# EAGLE board board_power (EAGLE 7.5.0)
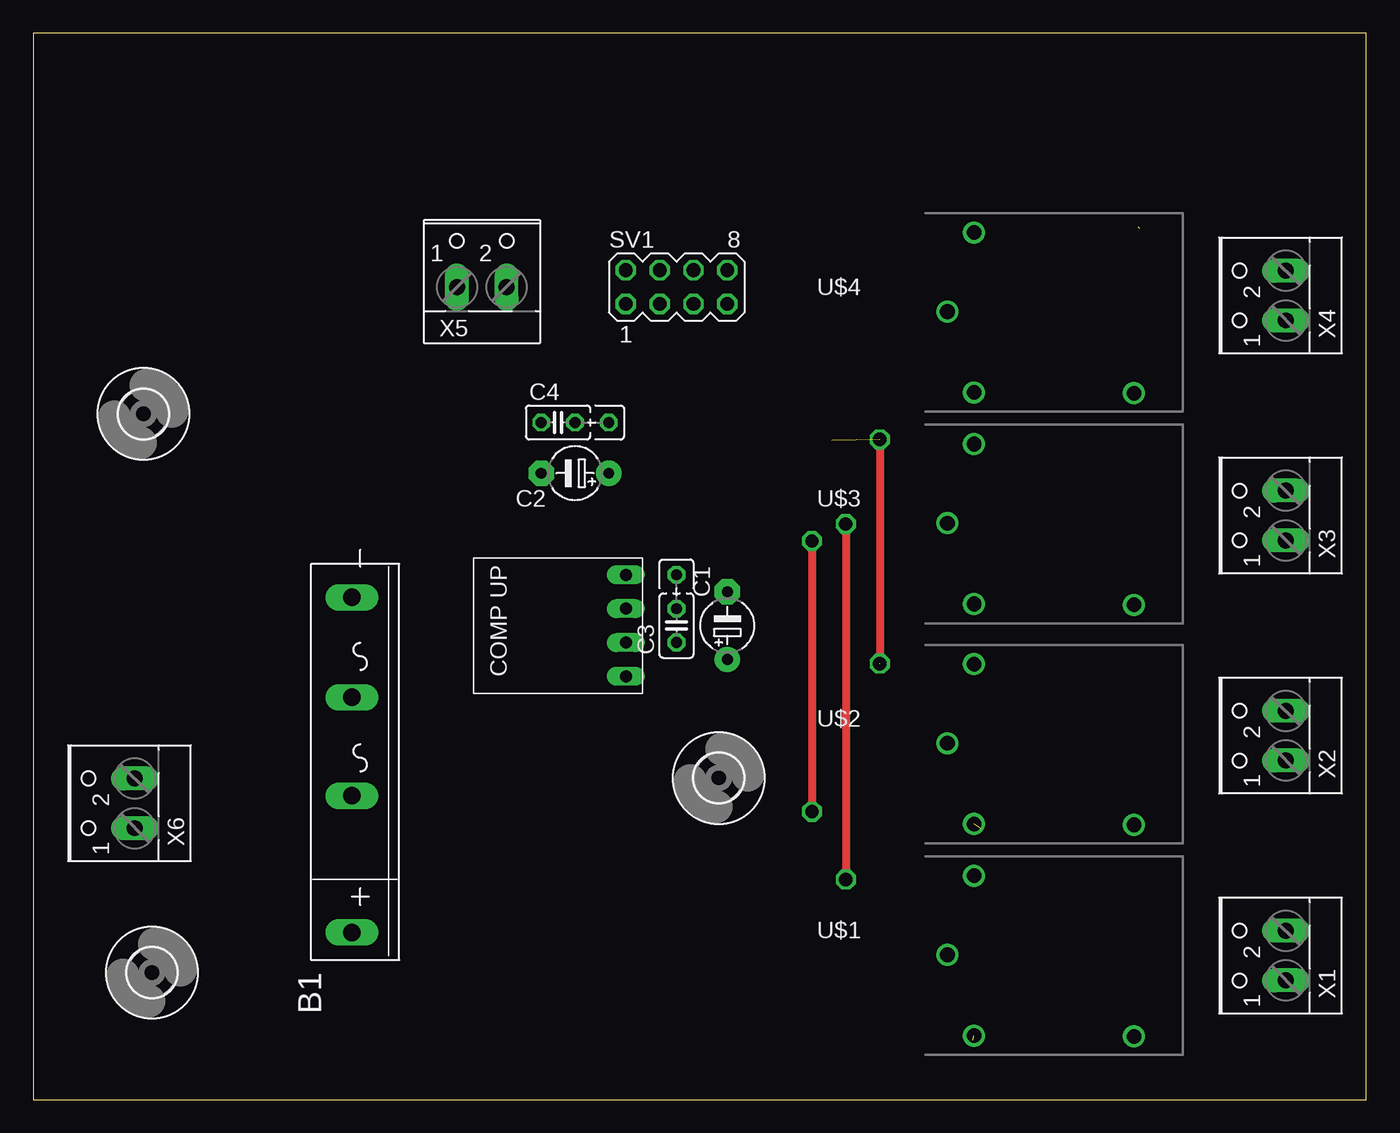
[diagram p0: board, top side]
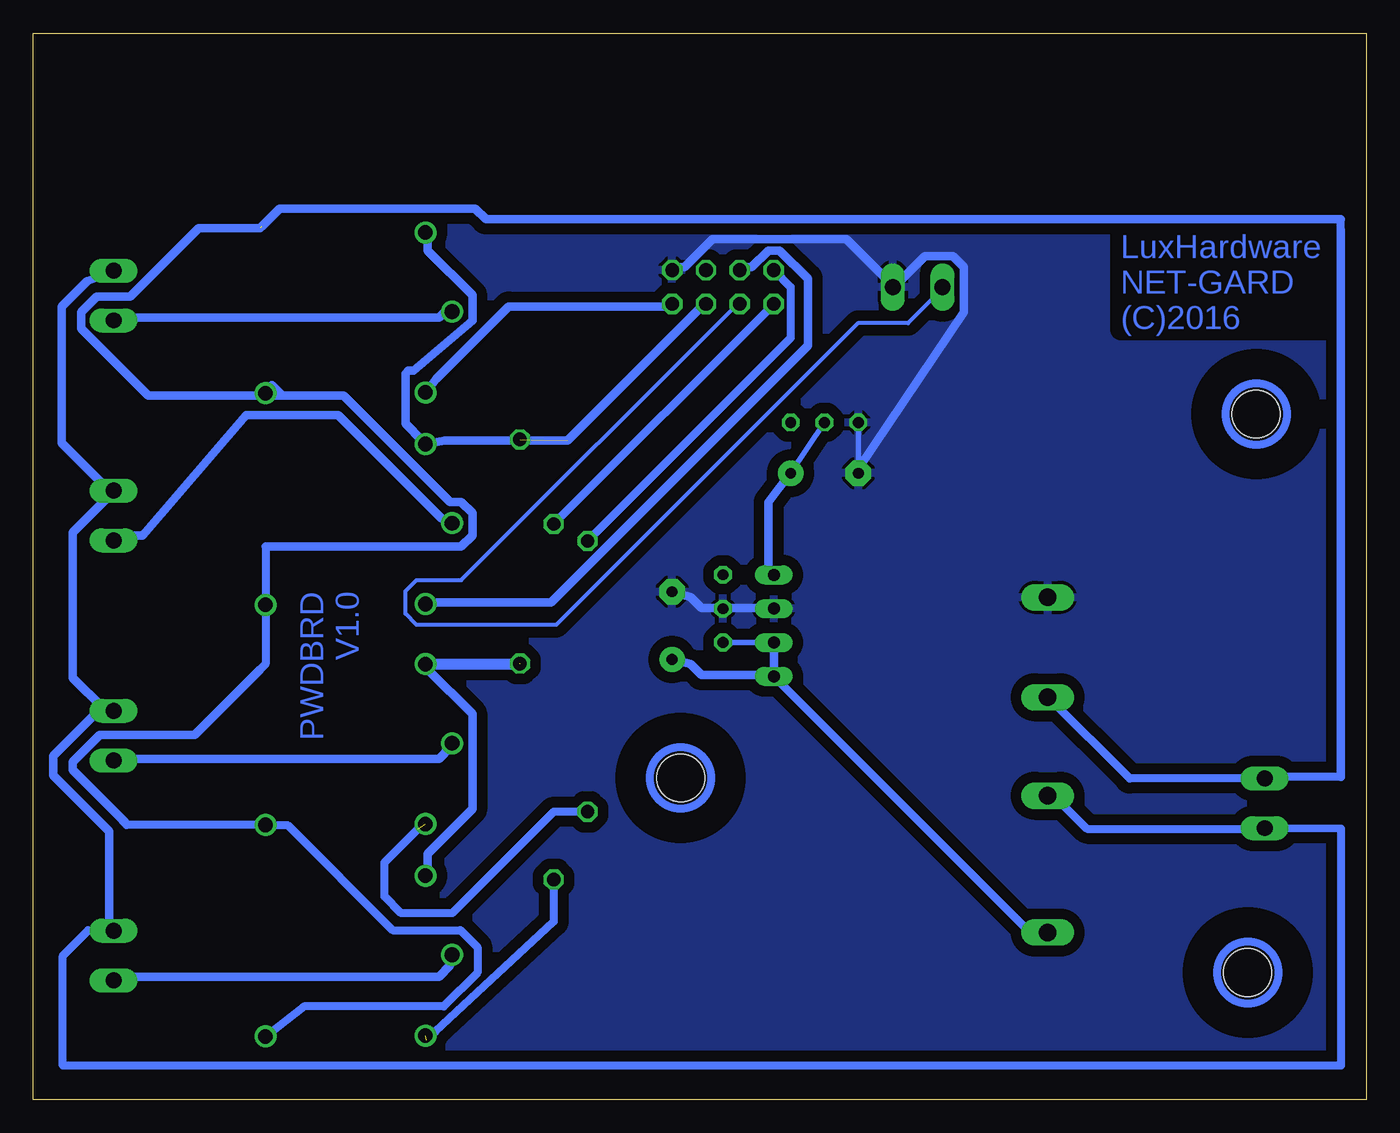
[diagram p1: board, bottom side, seen from below]

Size 100 x 80 mm. Coordinates in mm from the lower left corner, seen from the top.
Outline: 0,0 100,0 100,80 0,80 0,0
Copper layers (1*16): Top 0.035mm / dielectric 1.5mm / Bottom 0.035mm
Design rules "default *": minimum track width 10mil, minimum drill 24mil, track to track 8mil, track to pad 8mil, pad to pad 8mil, via to via 8mil, smd to smd 8mil, copper to edge 40mil, drill to drill 8mil, minimum pad ring 10mil, minimum via ring 8mil, stop-mask expansion 4mil, vias tented up to drill 0mil, thermal gap 10mil

## Footprints (pad centres in the part's own frame; a part is rotated, then mirrored left to right if it is on the bottom)
KBK10A = drill 1.321 long: + -14.142,1.5; - 11.004,1.5; AC1 -3.88,1.5; AC2 3.511,1.5
E5-4 = drill 0.813 pad 1.905: + -2.54,0 | drill 0.813 pad 1.905 octagon: - 2.54,0
C025_050-025X075 = drill 0.813 octagon: 1 -1.27,0; 2 1.27,0; 3 3.81,0
3,6 = hole 3.6: 0,0
MA04-2 = drill 1.016 octagon: 1 -3.81,-1.27; 2 -3.81,1.27; 3 -1.27,-1.27; 4 -1.27,1.27; 5 1.27,-1.27; 6 1.27,1.27; 7 3.81,-1.27; 8 3.81,1.27
LEG = drill 1.1: 1 0,0.06; 2 14,-6.065; C1 2,6; C2 2,-6
POLOLU-2098 = drill 0.9 long: P$1 -10.16,-1.27; P$2 -7.62,-1.27; P$3 -5.08,-1.27; P$4 -2.54,-1.27
PASSO3 = drill 1.194 long: 1 -2.5,-1.27; 2 1.23,-1.27

## Placement (x,y rotation side)
B1  [KBK10A]  25.4,26.67 90 top
C1  [E5-4]  52.07,35.56 90 top
C2  [E5-4]  40.64,46.99 180 top
C3  [C025_050-025X075]  48.26,35.56 90 top
C4  [C025_050-025X075]  39.37,50.8 0 top
H1  MOUNT-HOLE3.6  [3,6]  8.26,51.44 0 top
H2  MOUNT-HOLE3.6  [3,6]  8.89,9.53 0 top
H3  MOUNT-HOLE3.6  [3,6]  51.44,24.13 0 top
SV1  [MA04-2]  48.26,60.96 0 top
U$1  LEG-1A-5  [LEG]  68.58,10.79 0 top
U$2  LEG-1A-5  [LEG]  68.58,26.67 0 top
U$3  LEG-1A-5  [LEG]  68.58,43.18 0 top
U$4  LEG-1A-5  [LEG]  68.58,59.05 0 top
U$5  POLOLU-2098  [POLOLU-2098]  43.18,41.91 90 top
X1  [PASSO3]  92.71,11.43 90 top
X2  [PASSO3]  92.71,27.94 90 top
X3  [PASSO3]  92.71,44.45 90 top
X4  [PASSO3]  92.71,60.96 90 top
X5  [PASSO3]  34.29,62.23 0 top
X6  [PASSO3]  6.35,22.86 90 top

## Library data of the parts
B1 = rectifier_mod
C1-C4 = resistor
H1-H3 = holes
SV1 = con-lstb; OC_FARNELL: unknown; OC_NEWARK: unknown
U$1-U$4 = relay-mod
U$5 = eagle
X1-X6 = con-wago-500; MPN: 237-102; OC_FARNELL: unknown; OC_NEWARK: 70K9898

## Nets
GND: B1.- C1.- C2.- C3.2 C4.1 SV1.8 U$5.P$3 X5.2
N$1: SV1.1 U$1.C2
N$2: SV1.2 U$2.C2
N$3: SV1.4 U$3.C2
N$4: SV1.7 U$4.C2
N$5: SV1.3 X5.1
N$6: B1.AC2 U$1.2 U$2.2 U$3.2 U$4.2 X6.2
N$7: B1.AC1 X1.2 X2.2 X3.2 X4.2 X6.1
N$8: U$1.1 X1.1
N$9: U$2.1 X2.1
N$10: U$3.1 X3.1
N$11: U$4.1 X4.1
N$12: B1.+ C1.+ C3.1 U$5.P$1 U$5.P$2
N$13: C2.+ C4.2 U$5.P$4
VCC: SV1.5 U$1.C1 U$2.C1 U$3.C1 U$4.C1

## Tracks (layer width: path | path; a pad name or v marks a point on that pad's centre or on a via)
GND
  Bottom 0.406: C2.- C4.1
  Bottom 0.635: SV1.8 51.97,62.45 51.13,62.45 49.03,64.54 38.98,64.54 35.62,61.19 X5.2 35.2,61.19 33.11,63.28 31.01,63.28 30.18,62.45 30.18,59.09 38.1,47.36 C2.- | U$5.P$3 44.84,36.88 49.87,36.88 50.71,37.72 C1.-
  pour Bottom (isolate 0.813): 0,0 0,69.22 100.33,69.22 100.33,68.58 99.69,68.58 99.69,0
N$1  (via drill 1)  (1 unrouted)
  Top 0.61: v60.96,43.18 v60.96,16.51
  Bottom 0.61: SV1.1 v60.96,43.18 | v60.96,16.51 60.96,13.34 69.85,5.08 70.48,4.45
N$2  (via drill 1)  (1 unrouted)
  Top 0.61: v58.42,41.91 v58.42,21.59
  Bottom 0.61: SV1.2 43.18,60.96 43.18,57.15 v58.42,41.91 | v58.42,21.59 60.96,21.59 68.58,13.97 72.39,13.97 73.66,15.24 73.66,17.78 71.12,20.32
N$3
  Bottom 0.635: SV1.4 46.94,62.45 46.1,62.45 44.84,63.7 44.01,63.7 41.9,61.59 41.9,56.55 61.15,37.3 70.41,37.3 U$3.C2
N$4
  Bottom 0.635: SV1.7 52.39,59.51 64.33,59.51 69.77,54.06 U$4.C2
N$5
  Bottom 0.305: 47.36,59.51 67.89,38.98 71.25,38.98 72.08,38.14 72.08,36.46 71.25,35.62 60.77,35.62 38.14,58.26 34.37,58.26 31.85,60.77
  Bottom 0.635: 47.36,59.51 SV1.3 | 31.85,60.77 X5.1
N$6  (1 unrouted)
  Bottom 0.61: U$4.2 82.09,53.62 81.28,52.82 | B1.AC2 23.83,30.18 17.74,24.09 X6.2 7.5,24.21 1.89,24.21 | 82.56,41.49 82.56,37.13 U$3.2 82.58,32.67 82.98,32.27 | 93.09,20.79 93.34,20.95 93,20.61 U$2.2 80.93,20.61 73.03,12.7 67.94,12.7 66.67,11.43 66.67,9.53 69.22,6.99 79.69,6.99 U$1.2 | 1.89,65.27 1.89,66.03 1.91,66.04
  Bottom 0.635: 93.09,20.79 97.03,24.73 97.03,25.35 95.03,27.34 87.91,27.34 82.98,32.27 | 82.98,65.38 87.59,65.38 92.72,60.25 95.24,60.25 96.39,59.09 96.39,57.84 91.38,52.82 81.28,52.82 76.71,52.82 68.73,44.84 67.89,44.84 67.06,44.01 67.06,42.33 67.89,41.49 82.56,41.49 | 1.89,65.27 1.89,24.21 | 1.91,66.04 66.04,66.04 66.84,66.84 81.52,66.84 82.88,65.48
N$7
  Bottom 0.61: B1.AC1 23.43,22.79 20.95,20.32 7.66,20.32 X6.1 1.91,20.32 1.91,2.54 97.79,2.54 97.79,10.79 95.89,12.7 94.02,12.7 X1.2
  Bottom 0.635: 94.3,12.36 94.3,20.1 98.5,24.31 98.5,25.77 94.93,29.34 X2.2 94.72,29.34 97.03,31.65 97.03,42.53 94.3,45.26 X3.2 94.3,45.68 97.87,49.25 97.87,59.51 95.97,61.4 94.28,62.04 94.3,62.03 X4.2 | 94.3,12.34 94.3,12.36 | 94.3,12.36 X1.2
N$8
  Bottom 0.635: X1.1 93.88,9.22 69.57,9.22 68.73,10.06 U$1.1
N$9
  Bottom 0.635: X2.1 93.88,25.57 69.57,25.57 68.73,26.4 U$2.1
N$10
  Bottom 0.635: X3.1 93.88,42.33 91.78,42.33 84.04,51.35 77.13,51.35 69.37,43.59 U$3.1
N$11
  Bottom 0.635: X4.1 93.88,58.67 69.57,58.67 68.73,59.51 U$4.1
N$12
  Bottom 0.406: U$5.P$2 C3.1
  Bottom 0.61: B1.+ 25.23,12.53 U$5.P$1
  Bottom 0.635: U$5.P$1 44.42,31.85 44.42,33.95 U$5.P$2 | U$5.P$1 44.84,31.85 49.87,31.85 50.71,32.69 C1.+ | 44.42,31.43 U$5.P$1
N$13
  Bottom 0.406: C2.+ C4.2
  Bottom 0.635: C2.+ 44.84,44.84 44.84,39.4 U$5.P$4
VCC  (via drill 1 pad 0.81)  (2 unrouted)
  Top 0.61: v63.5,49.53 v63.5,32.7
  Bottom 0.635: U$1.C1 70.41,16.34 70.41,18.44 67.06,21.79 67.06,28.92 70.41,32.27 U$2.C1 70.83,32.69 | SV1.5 49.87,59.51 59.93,49.45 69.14,49.45 U$3.C1 70.83,49.45 72.08,50.71 72.08,54.48 71.88,54.69 71.46,54.69 67.06,58.46 67.06,60.35 70.41,63.7 70.41,65.38 U$4.C1
  Bottom 0.813: U$2.C1 63.5,32.67
(copper drawn outside any net)
  shapes: Bottom circle x3

## Text on the board
Bottom: LuxHardware / NET-GARD / (C)2016 | PWDBRD / V1.0